# Altium PCB PCB1.PcbDoc
Units mil, origin at the board's own origin, x right, y up, seen from the top; angles counter-clockwise.
Board outline 787.4 x 511.81 mil, 2 copper layers (Top Layer, Bottom Layer); 20 components, 20 nets, 117 pads, 43 vias.
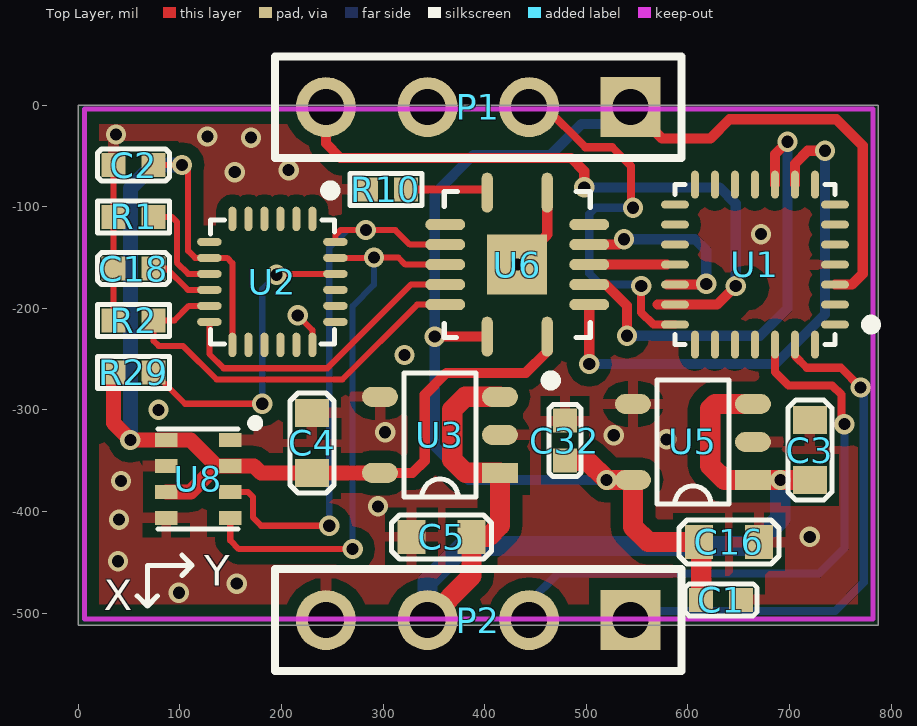
[diagram p0: Top Layer view]
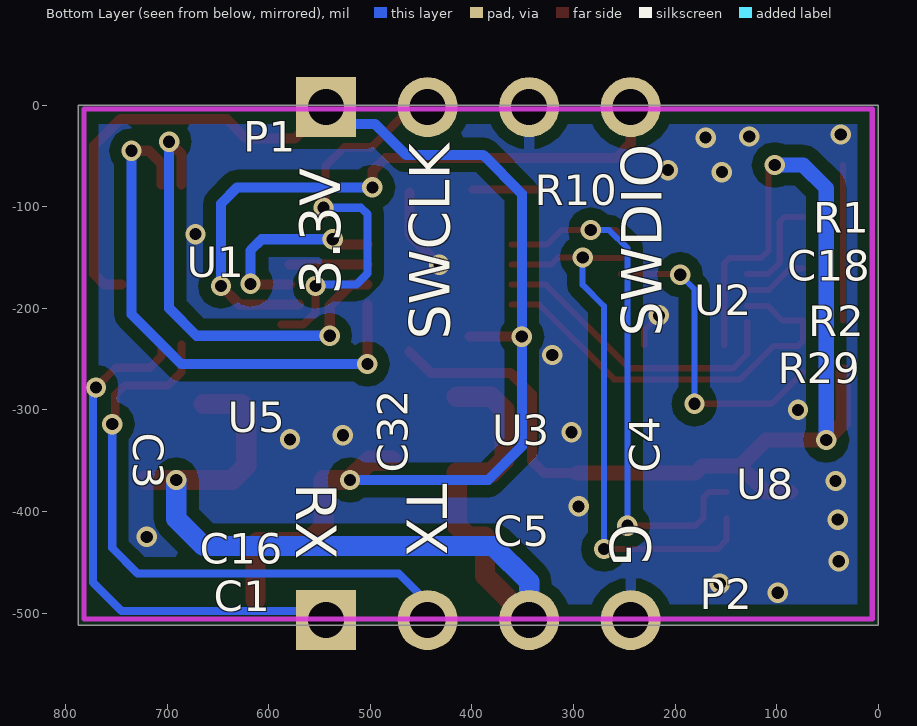
[diagram p1: Bottom Layer view, seen from below]

## Layer stack, top to bottom
Top Layer: signal copper 1.4
Dielectric: dielectric 12.6, FR-4, Dk 4.8
Bottom Layer: signal copper 1.4

## Board outline
0,-511.81 787.4,-511.81 787.4,0 0,0

## Design rules (kind name [scope] priority, off if disabled: settings)
Clearance [All] p1: gap=12
MinimumSolderMaskSliver [All] p1: minsoldermaskwidth=1.97
PolygonConnect [All] p1: connectstyle=Relief reliefconductorwidth=10 reliefentries=4 polygonreliefangle="90 Angle"
RoutingVias [All] p1: holewidth=28 width=50 viastyle="Through Hole" minholewidth=28 minwidth=50 maxholewidth=28 maxwidth=50
SilkToSilkClearance [All] p1: silktosilkclearance=1.97
SilkscreenOverComponentPads [All] p1: minsilkscreentomaskgap=0
SolderMaskExpansion [All] p1: expansion=4
Width [All] p1: maxlimit=200 minlimit=5 preferedwidth=10
25 further rules are at their usual default settings.

## Components (designator, comment, footprint, x,y, rotation, side; value= is the part's Value field where it differs from the comment)
C1 "0.1uF/10V" 0402C 613,-487 r0 top
C2 "0.1uF" 0402C 34.63,-59 r0 top
C3 "10uF/10V" 0603C 720,-310 r270 top
C4 "10uF/10V" 0603C 230,-303 r270 top
C5 "10uF/10V" 0603C 328,-425 r0 top
C16 "10uF/10V" 0603C 670,-430 r180 top
C18 "0.1uF/10V" 0402C 74,-161 r180 top
C32 "0.1uF/10V" 0402C 479,-350 r90 top
P1 "Header 4" HDR1X4 543.7,-2 r180 top
P2 "Header 4" HDR1X4 543.7,-506.81 r180 top
R1 "10K" 0402R 34.63,-110 r0 top
R2 "10K" 0402R 34.63,-212 r0 top
R10 "10K" 0402R 283,-83 r0 top
R29 "10K" 0402R 74,-263 r180 top
U1 "STM32G031G6U6" STM32G031G6U6 666,-157 r180 top
U2 "ICM-20948" QFN24-0.4 191,-174 r270 top
U3 "TLV70218DBVR" SOT23-5(DBV) 415,-362 r180 top
U5 "TLV70230DBVR" SOT23-5(DBV) 664,-369 r180 top
U6 "TXS0104ERGRY" TXS0104ERGRY 432,-157 r90 top
U8 "BMP280" LGA-8 118,-368 r0 top

## Footprints (in the part's own frame and the unit in brackets; to place one, negate y for a bottom-side part, rotate by r counter-clockwise, add the part's x,y. Pads: shape width x height; smd on the part's side, far side on the other; paste and mask are expansions set on the pad)
0402C [mm]
  rect 0.6x0.6 smd: 1(0,0) 2(1,0)
  silkscreen extent -0.4,-0.4 1.4,0.4
0402R [mm]
  rect 0.6x0.6 smd: 1(0,0) 2(1,0)
  silkscreen extent -0.4,-0.4 1.4,0.4
0603C [mm]
  rect 0.7x0.85 smd: 1(0,0) 2(1.5,0)
  silkscreen extent -0.5,-0.55 2,0.55
HDR1X4 [mm] "Connector; Header; 4 Position"
  rect 1.5x1.5 hole 0.9: 1(0,0)
  round 1.5 hole 0.9: 2(2.54,0) 3(5.08,0) 4(7.62,0)
  silkscreen extent -1.27,-1.27 8.89,1.27
LGA-8 [mm]
  rect 0.559x0.35 smd: 1(0.8,0.975) 2(0.8,0.325) 3(0.8,-0.325) 4(0.8,-0.975) 5(-0.8,-0.975) 6(-0.8,-0.325) 7(-0.8,0.325) 8(-0.8,0.975)
  silkscreen extent -1,-1.25 1.52,1.5
QFN24-0.4 [mil]
  oval 24x8 smd: 1(-62.01,39.37) 2(-62.01,23.62) 3(-62.01,7.87) 4(-62.01,-7.87) 5(-62.01,-23.62) 6(-62.01,-39.37) 13(62.01,-39.37) 14(62.01,-23.62) 15(62.01,-7.87) 16(62.01,7.87) 17(62.01,23.62) 18(62.01,39.37)
  oval 8x24 smd: 7(-39.37,-62.01) 8(-23.62,-62.01) 9(-7.87,-62.01) 10(7.87,-62.01) 11(23.62,-62.01) 12(39.37,-62.01) 19(39.37,62.01) 20(23.62,62.01) 21(7.87,62.01) 22(-7.87,62.01) 23(-23.62,62.01) 24(-39.37,62.01)
  silkscreen extent -95,-61 61,62
SOT23-5(DBV) [mm]
  rect 0.9x0.5 smd: 1(0,0)
  oval 0.9x0.5 smd: 2(0,-0.95) 3(0,-1.9) 4(3,-1.9) 5(3,0)
  silkscreen extent 0.6,-2.5 2.4,0.6
STM32G031G6U6 [mm]
  oval 0.7x0.2 smd: 1(-2,1.5) 2(-2,1) 3(-2,0.5) 4(-2,0) 5(-2,-0.5) 6(-2,-1) 7(-2,-1.5) 15(2,-1.5) 16(2,-1) 17(2,-0.5) 18(2,0) 19(2,0.5) 20(2,1) 21(2,1.5)
  oval 0.2x0.7 smd: 8(-1.5,-2) 9(-1,-2) 10(-0.5,-2) 11(0,-2) 12(0.5,-2) 13(1,-2) 14(1.5,-2) 22(1.5,2) 23(1,2) 24(0.5,2) 25(0,2) 26(-0.5,2) 27(-1,2) 28(-1.5,2)
  silkscreen extent -3.03,-2 2,2, body extent -2,-2 2,2, height 0.8
TXS0104ERGRY [mm]
  oval 1x0.28 smd: 1(-1.8,-0.75) 7(1.8,-0.75) 8(1.8,0.75) 14(-1.8,0.75)
  oval 0.28x1 smd: 2(-1,-1.8) 3(-0.5,-1.8) 4(0,-1.8) 5(0.5,-1.8) 6(1,-1.8) 9(1,1.8) 10(0.5,1.8) 11(0,1.8) 12(-0.5,1.8) 13(-1,1.8)
  rect 1.5x1.5 smd: 15(0,0)
  silkscreen extent -3.02,-1.83 1.83,1.83

## Part data
C1 C3 C4 C5 C16 C18 C32: library part Cap, "Capacitor"
C2: library part C
P1 P2: "Header, 4-Pin"
R1 R2 R29: library part R, "R"
R10: library part Res2, "Resistor"
U3: library part TLV70230DBVR
U6: library part TXS0104EPWR

## Via types
v1: diameter 20, hole 12, Top Layer to Bottom Layer, tented both sides, 43 vias

## Nets (pads, with @x,y where several pads share a name; then routed paths per layer and width w, separated by ;. In a path a pad name is that pad's centre, name@x,y a point inside that pad or via, vN(x,y) a via of type N, cw(c..) or ccw(c..) an arc to the next point about the centre after c; other vN are vias at no path point)
FSYNC: R2.2 U2.11 U6.13 | length 414.3
  Top Layer w6: U2.11 108.82,-197.62 94.44,-212 R2.2 74,-232 79,-237 103,-237 136,-270 260,-270 333.63,-196.37 U6.13
GND: C1.2 C2.1 C3.1 C4.1 C5.1 C16.1 C18.2 C32.2 P1.3 P2.4 R1.1 R2.1 R10.1 U1.4 U2.18 U3.2 U3.4 U5.2 U5.4 U6.7 U6.15 U8.1 U8.5 U8.7 | length 271.1
  Top Layer w6: R2.1 C18.2 R1.1 C2.1 ; v1(216,-207) 230.37,-221.37 U2.18
  Top Layer w10: v1(432,-157) 461.53,-127.47 U6.7
  other v1: 99,-480 156,-471 39,-449 720,-425 40,-408 295,-395 42,-370 579,-329 527,-325 302,-322 79,-300 321,-246 672,-127 154,-66 207,-64 170,-32 127,-31 37,-29
INT1: U2.12 U6.12 | length 303.7
  Top Layer w6: U2.12 128.99,-244.99 143,-259 245,-259 327.31,-176.68 U6.12
MCU_FSYNC: U1.9 U6.2 | length 527.4
  Top Layer w10: v1(502.87,-254.87) U6.2 ; U1.9 705.37,-57.63 718,-45 v1(735,-45)
  Bottom Layer w10: v1(502.87,-254.87) 686.13,-254.87 735,-206 v1(735,-45)
MCU_INT1: U1.10 U6.3 | length 455.9
  Top Layer w10: U6.3 519.29,-176.68 540,-197.39 v1(540,-227) ; U1.10 685.69,-48.31 v1(698,-36)
  Bottom Layer w10: v1(540,-227) 671,-227 698,-200 v1(698,-36)
MCU_SCL: U1.18 U6.4 | length 76.4
  Top Layer w10: U6.4 U1.18@579.26,-157
MCU_SDA: U1.19 U6.5 | length 193.9
  Top Layer w10: U6.5 531.69,-137.32 v1(537,-132) ; U1.19@579.26,-176.69 U1.19 617.31,-176.69 v1(618,-176)
  Bottom Layer w10: v1(537,-132) 607,-132 618,-143 v1(618,-176)
NetC18_1: C18.1 U2.10 | length 63.6
  Top Layer w6: C18.1 87,-161 107,-181 107.87,-181.87 U2.10
NetR1_2: R1.2 U2.9 | length 101.7
  Top Layer w6: R1.2 92,-110 97,-115 97,-143.36 97,-155 108.13,-166.13 U2.9
NetR29_1: R29.1 U2.22 | length 311
  Top Layer w6: R29.1 105,-294 v1(181,-294) ; v1(195,-167) 195.87,-166.13 U2.22
  Bottom Layer w6: v1(181,-294) 181,-181 v1(195,-167)
RXD: P2.1 U1.27 | length 522.2
  Top Layer w8: U1.27 705.37,-246.89 717,-258.52 750.52,-258.52 v1(770,-278)
  Bottom Layer w8: P2.1 552.51,-498 745,-498 773,-470 773,-413 v1@773,-281
SCL: U2.23 U6.11 U8.4 | length 552.5
  Top Layer w6: U8.4 149.5,-428.5 158,-437 v1(270,-437) ; U2.23 v1@290.62,-150.38 ; v1(291,-150) 315,-150 322,-157 U6.11
  Bottom Layer w6: v1(270,-437) 270,-198 291,-177 v1(291,-150)
SDA: U2.24 U6.10 U8.3 | length 562.4
  Top Layer w6: U8.3 166.8,-380.8 172,-386 172,-406 180,-414 v1(247,-414) ; U2.24 253.01,-127.99 258,-123 v1(283,-123) 312,-123 326.31,-137.32 U6.10
  Bottom Layer w6: v1(247,-414) 247,-140.64 264.64,-123 v1(283,-123)
SWCLK: P1.2 U1.21 | length 392.1
  Top Layer w8: P1.2 445,-2 459.5,-2 499,-41.5 525.5,-41.5 544,-60 544,-101 v1(546,-101) ; v1(554,-178) 554,-204 566.06,-216.06 U1.21
  Bottom Layer w8: v1(546,-101) 509,-101 502.87,-107.13 502.87,-165.87 513.69,-176.68 552.69,-176.68 v1(554,-178)
SWDIO: P1.4 U1.20 | length 644.2
  Top Layer w10: P1.4 243.7,-37.7 258,-52 485,-52 498,-65 v1@498,-79 ; 570.37,-196.37 U1.20 ; U1.20@579.26,-196.37 U1.20 ; v1(647,-178) 628.63,-196.37 U1.20
  Bottom Layer w10: v1(498,-81) 631,-81 647,-97 v1(647,-178)
TXD: P2.2 U1.26 | length 603.6
  Top Layer w8: U1.26 685.69,-262.69 699,-276 742,-276 751,-285 751,-311 v1(754,-314)
  Bottom Layer w8: P2.2 443.7,-489.3 472,-461 729,-461 754,-436 754,-402 v1(754,-314)
VBAT: C3.2 C5.2 P2.3 U3.1 U3.3 U5.1 U5.3 | length 990.2
  Top Layer w20: P2.3 387.06,-463.46 C5.2 403.74,-425 415,-413.74 U3.1 381,-362 368,-349 368,-300 380.8,-287.2 U3.3 ; U5.3 626.8,-294.2 622,-299 622,-355 636,-369 U5.1 664.06,-369.06 C3.2
  Bottom Layer w20: P2.3 343.7,-469.3 379,-434 664,-434 691,-407 v1(691,-369.06)
VCC_1V8: C2.2 C4.2 R29.2 U2.8 U2.13 U3.5 U6.1 U8.2 U8.6 U8.8 | length 1208.6
  Top Layer w6: C2.2 90,-59 v1(102,-59) 108,-65 108,-143.36 115.02,-150.38 U2.8 146.38,-150.38 151.63,-155.63 U2.13
  Top Layer w10: U3.5 329,-362 341,-350 341,-285 362.43,-263.57 440.43,-263.57 U6.1@461.53,-242.47
  Top Layer w15: R29.2 34.63,-313 v1(51.24,-329.61) U8.8 ; 75,-329.61 U8.8 ; U8.6 110.61,-380.8 136.2,-355.2 ; U3.5 296.83,-362.06 C4.2 179.85,-362.06 173,-355.2 U8.2 136.2,-355.2 ; U8.8 110.61,-329.61 136.2,-355.2
  Bottom Layer w15: v1(51.24,-329.61) 51.24,-81.76 74,-59 v1(102,-59)
VCC_3V: C1.1 C16.2 C32.1 P1.1 U1.3 U5.5 U6.14 | length 1377.6
  Top Layer w10: v1(350.87,-227.87) U6.14 ; P1.1 574.7,-33 622,-33 641,-14 746,-14 772,-40 772,-166 761.31,-176.69 U1.3
  Top Layer w20: C32.1 501,-350 v1(520,-369) U5.5 545.89,-415 560.89,-430 C16.2 613,-432.06 C1.1
  Bottom Layer w10: v1@519,-369 384,-369 350.87,-335.87 v1(350.87,-227.87) 350.87,-87.13 389,-49 465,-49 495.49,-18.51 527.19,-18.51 P1.1
VDD: R10.2 U6.8 | length 77
  Top Layer w8: R10.2 U6.8@399.34,-83
pads on no net: U1.1 U1.2 U1.5 U1.6 U1.7 U1.8 U1.11 U1.12 U1.13 U1.14 U1.15 U1.16 U1.17 U1.22 U1.23 U1.24 U1.25 U1.28 U2.1 U2.2 U2.3 U2.4 U2.5 U2.6 U2.7 U2.14 U2.15 U2.16 U2.17 U2.19 U2.20 U2.21 U6.6 U6.9

## Polygon pours and split planes (outlines as drawn)
GND on Top Layer "Top Layer-No Net" (solid, remove dead copper): -9,3 -1,11 800,11 800,-522 796,-526 705,-526 -6,-526 -14,-518 -31,-501 -31,-449 -31,-19 -9,3
GND on Bottom Layer "Top Layer-No Net" (solid, remove dead copper): -22,18 -18,14.31 804,14.31 804,-493.35 796,-500.73 784,-511.81 -20,-511.81 -20,8.77 -14,14.31

## Keep-outs
Keep-Out Layer:
  lines w5: 6,-506 782,-506 782,-4 6,-4 6,-506

## Other copper
Top Layer:
  pour cut-out: 151.63,-129.17 230.37,-129.17 230.37,-216.9 232.78,-219.31 232.08,-220 151.63,-220

## Silkscreen, mask and mechanical layers (free items; w line width, h text height)
Top Overlay:
  lines w5: 58,-483 68,-493 ; 78,-483 68,-493 ; 102,-463 112,-453 ; 102,-443 112,-453 ; 68,-493 68,-453 112,-453
  text "Y" at 124,-473 h30
  text "X" at 25,-497 h30
Bottom Overlay:
  text "3.3V" at 529.42,-186.82 h40 r270
  text "SWDIO" at 213,-228 h40 r270
  text "SWCLK" at 422,-231 h40 r270
  text "RX" at 573,-372 h40 r90
  text "TX" at 464,-373 h40 r90
  text "G" at 264,-412 h40 r90
Mechanical 1:
  the board outline again, w5